# Altium PCB ESC_4in1_8layer.PcbDoc (part 2 of 2)
Units mm, origin at the board's own origin, x right, y up, seen from the top; angles counter-clockwise.
Board outline 33 x 33 mm, 8 copper layers (Top Layer, VBAT 1, Signal 1, GND 1, VBAT 2, Signal 2, GND 2, Bottom Layer), stack 1.028 mm thick; 215 components, 149 nets, 833 pads, 210 vias.
Unrouted connection lines stored in the file: 316.
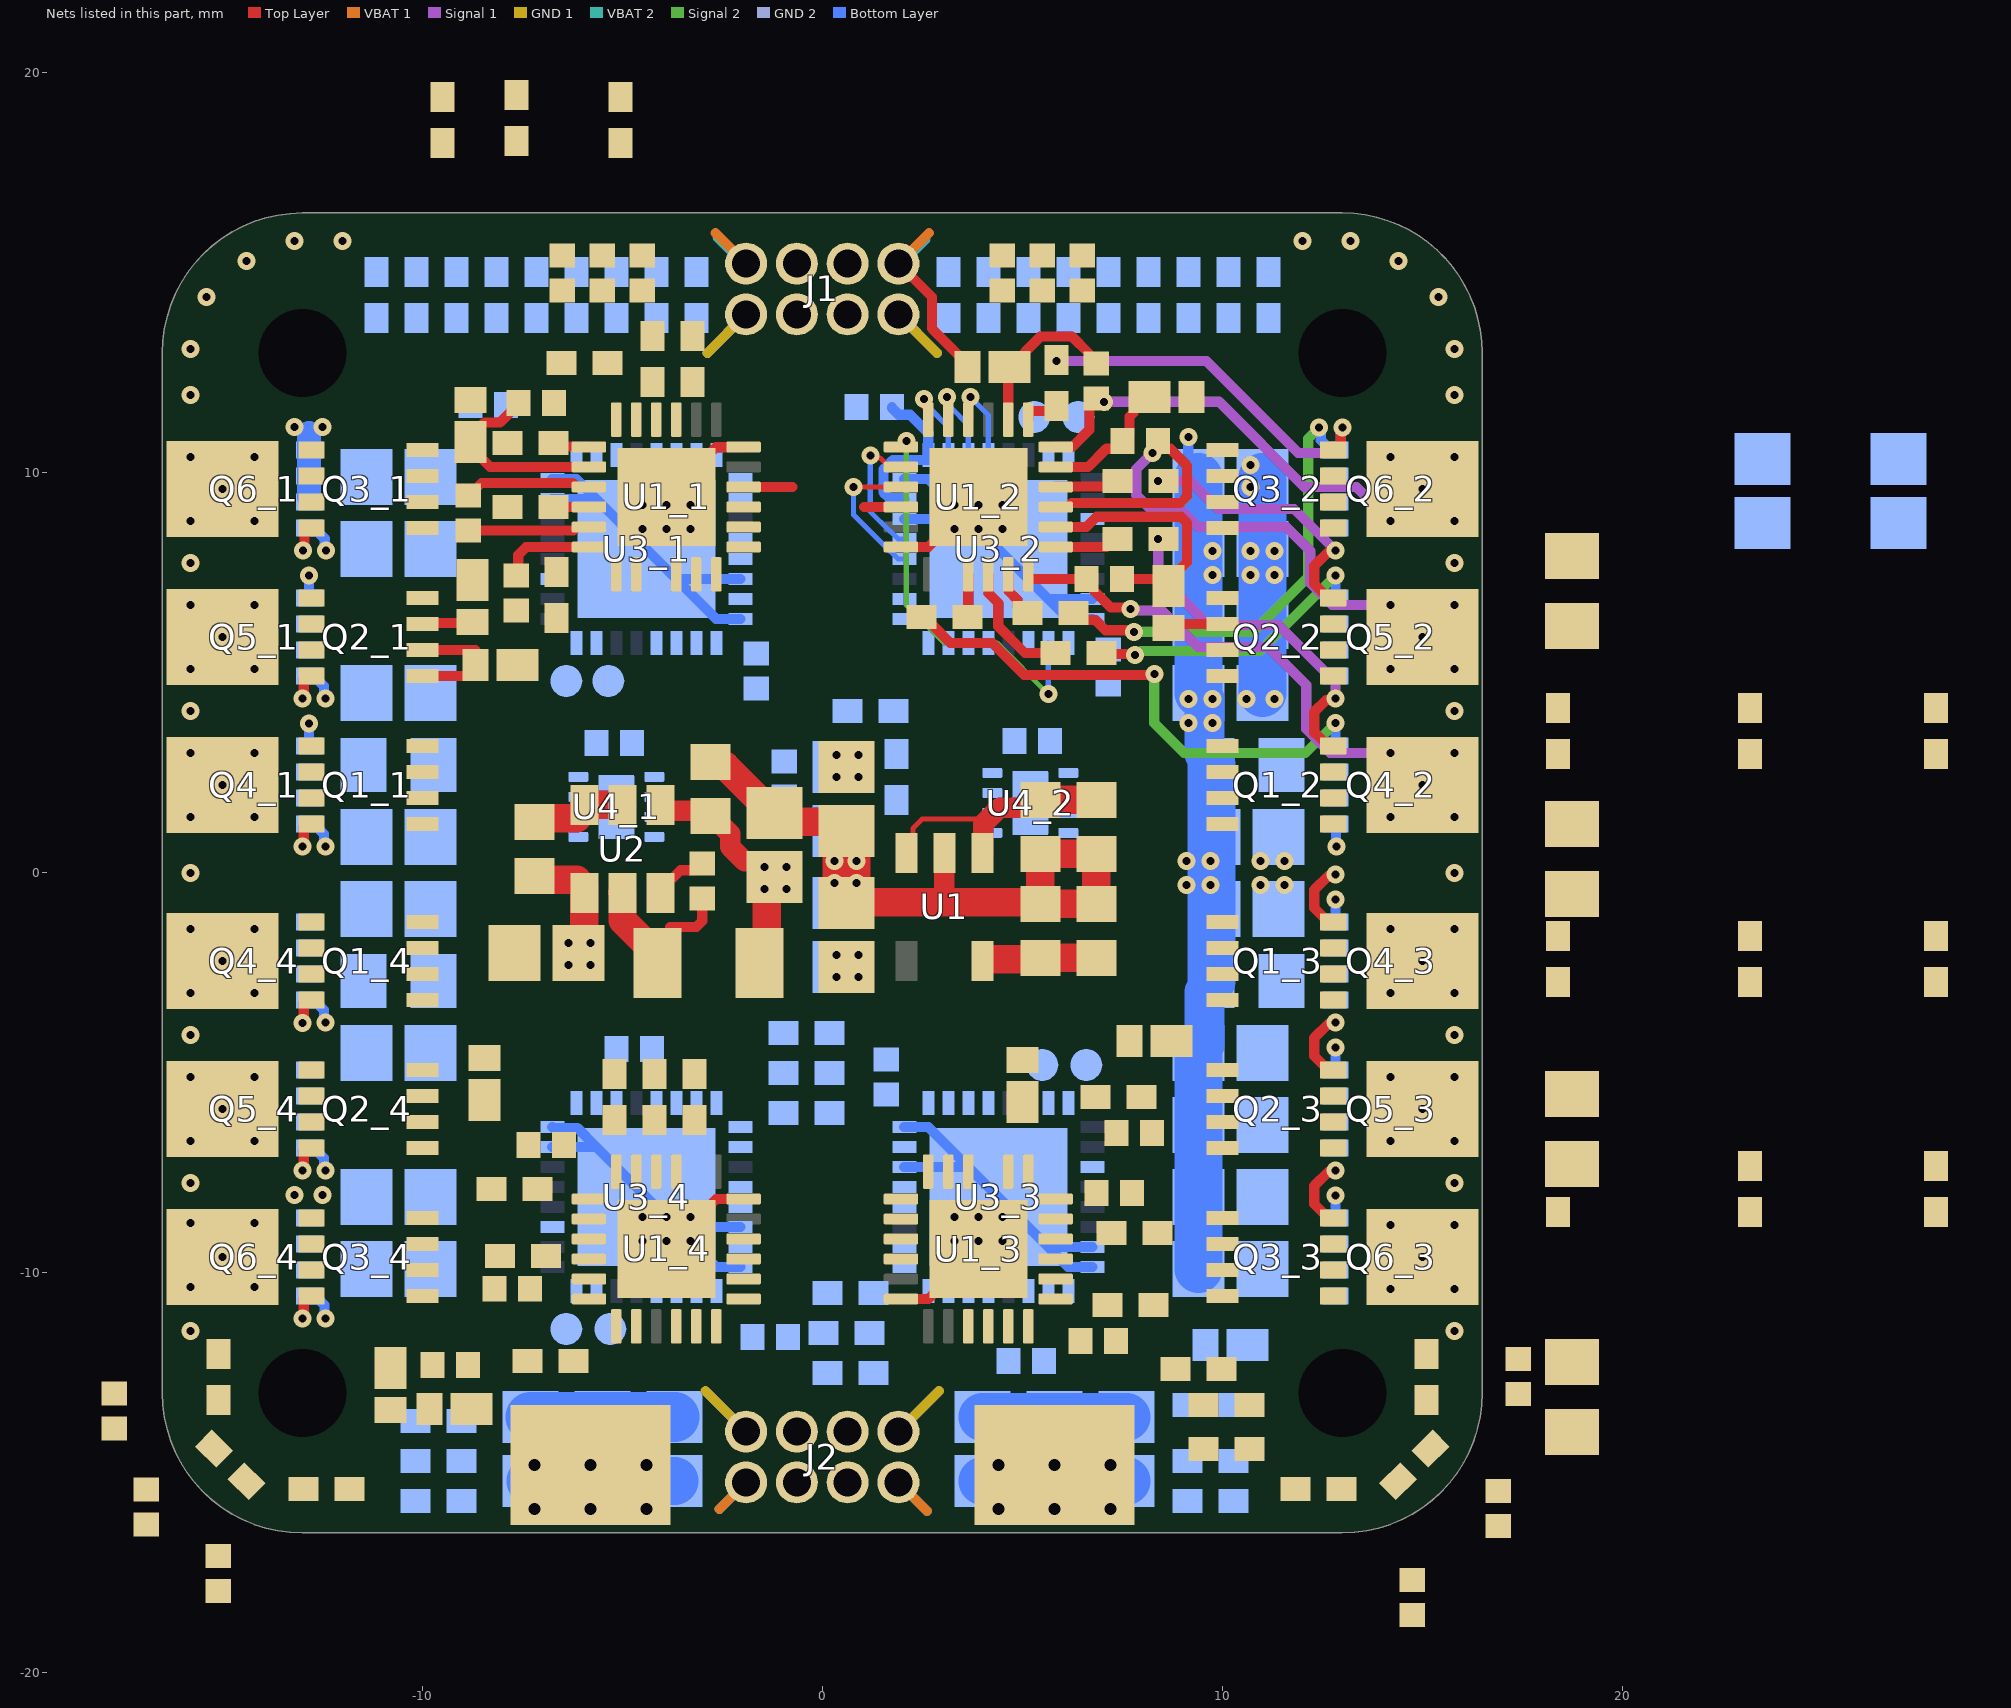
[diagram p8: the nets of this part, all layers, seen from the top]

## Via types
v1: diameter 0.45, hole 0.2, Top Layer to Bottom Layer, tented both sides, 198 vias
v2: diameter 0.6, hole 0.3, Top Layer to Bottom Layer, tented both sides, 12 vias

## Nets (pads, with @x,y where several pads share a name; then routed paths per layer and width w, separated by ;. In a path a pad name is that pad's centre, name@x,y a point inside that pad or via, vN(x,y) a via of type N, cw(c..) or ccw(c..) an arc to the next point about the centre after c; other vN are vias at no path point)
3V3: C8.1 C9.2 C16_1.2 C16_2.2 C16_3.2 C16_4.2 C17_1.2 C17_2.2 C17_3.2 C17_4.2 C32_1.1 C32_2.1 U1.5 U3_1.1 U3_1.15 U3_1.17 U3_2.1 U3_2.15 U3_2.17 U3_3.1 U3_3.15 U3_3.17 U3_4.1 U3_4.15 U3_4.17 U4_1.8 U4_2.8 | length 7
  Top Layer w0.712: U1.5@4.1,-2.163 5.412,-2.163 C9.2@5.45,-2.125 C8.1@6.85,-2.125
  Bottom Layer w0.254: C17_2.2@1.74,11.65 1.74,11.63 1.913,11.457 2.193,11.457 2.65,11 U3_2.17@2.65,10.45 2.65,10.344 2.627,10.321 1.766,10.321 1.527,10.082 1.527,9.522 1.676,9.373 2.027,9.373 U3_2.15@2.05,9.35
5V: C6.2 C7.1 C12.2 C13.2 L1.2 U1.1 U1.3 U2.1 | length 12.8
  Top Layer w0.127: U1.3@2.1,0.5 2.266,0.666 2.266,1.116 2.5,1.35 3.888,1.35 4.019,1.219
  Top Layer w0.254: C13.2@-1.481,-0.381 -1.469,-0.381 v1(-1.45,-0.4) ; v1(-1.45,0.15) -1.337,0.037 C13.2@-1.2,-0.1
  Top Layer w0.512: U2.1@-4.044,1.556 C12.2@-2.981,1.556 ; C12.2@-2.8,1.425 -2.75,1.425 -2.3,0.975 -2.3,0.65 -1.944,0.294 -1.644,0.294 -1.625,0.275 -1.625,-0.025 C13.2@-1.512,-0.138 ; U1.1@4,0.5 4.019,0.519 4.019,1.219 4.431,1.631 5.256,1.631 C6.2@5.45,1.825
  Top Layer w0.712: U2.1@-4.05,1.7 -4.05,1.562 U2.1@-4.044,1.556 ; C12.2@-2.85,1.425 C12.2@-2.8,1.425 ; L1.2@-1.575,-2.25 -1.387,-2.063 -1.387,-0.394 -1.437,-0.394 C13.2@-1.451,-0.381 ; C13.2@-1.481,-0.381 -1.375,-0.275 C13.2@-1.2,-0.1 ; C6.2@5.45,1.825 C7.1@6.85,1.825
  other v1: -0.9,-0.4 -0.9,0.15 -14.4,15.3 14.4,15.3 -13.2,15.8 -12,15.8 12,15.8 13.2,15.8
BSTA_1: C3_1.1 D1_1.1 U1_1.20
BSTA_2: C3_2.1 D1_2.1 U1_2.20 | length 4.2
  Top Layer w0.254: U1_2.20@4.65,11.335 4.65,12.625 D1_2.1@4.675,12.65 4.8,12.65 5.073,12.923 5.073,13.028 5.461,13.416 6.239,13.416 6.657,12.998 6.657,12.913 6.83,12.74 C3_2.1@6.85,12.74
BSTA_3: C3_3.1 D1_3.1 U1_3.20
BSTA_4: C3_4.1 D1_4.1 U1_4.20
BSTB_1: C2_1.1 D2_1.1 U1_1.17 | length 3.1
  Top Layer w0.254: C2_1.1@-8.85,8.56 -6.22,8.56 -6.13,8.65 U1_1.17@-5.835,8.65
BSTB_2: C2_2.1 D2_2.1 U1_2.17 | length 3.4
  Top Layer w0.254: U1_2.17@5.835,10.15 6.646,10.15 7.103,10.607 7.337,10.607 7.51,10.78 C2_2.1@7.51,10.8 7.683,10.973 7.683,11.408 7.777,11.502 7.777,11.627 8.05,11.9 D2_2.1@8.175,11.9
BSTB_3: C2_3.1 D2_3.1 U1_3.17
BSTB_4: C2_4.1 D2_4.1 U1_4.17
BSTC_1: C1_1.1 D3_1.1 U1_1.14 | length 5
  Top Layer w0.254: C1_1.1@-7.59,11.75 -7.59,11.73 -8.054,11.266 -8.434,11.266 -8.8,10.9 D3_1.1@-8.8,10.775 -8.8,10.65 -8.3,10.15 U1_1.14@-5.835,10.15
BSTC_2: C1_2.1 D3_2.1 U1_2.14 | length 6.5
  Top Layer w0.254: U1_2.14@5.835,8.65 6.6,8.65 6.857,8.907 8.967,8.907 9.116,8.758 9.116,7.766 8.65,7.3 D3_2.1@8.65,7.175 8.475,7.35 C1_2.1@7.49,7.35
BSTC_3: C1_3.1 D3_3.1 U1_3.14
BSTC_4: C1_4.1 D3_4.1 U1_4.14
ESC1: J1.3 U3_1.27
ESC2: J1.5 U3_2.27
ESC3: J2.3 U3_3.27
ESC4: J2.5 U3_4.27
GHA_1: R3_1.1 U1_1.19
GHA_2: R3_2.1 U1_2.19 | length 1
  Top Layer w0.254: U1_2.19@5.15,11.335 5.15,11.538 5.158,11.546 5.721,11.546 R3_2.1@5.85,11.675
GHA_3: R3_3.1 U1_3.19
GHA_4: R3_4.1 U1_4.19
GHB_1: R14_1.1 U1_1.16 | length 0.9
  Top Layer w0.254: R14_1.1@-6.725,9.15 U1_1.16@-5.835,9.15
GHB_2: R14_2.1 U1_2.16 | length 1.6
  Top Layer w0.254: U1_2.16@5.835,9.65 5.843,9.658 7.233,9.658 R14_2.1@7.375,9.8
GHB_3: R14_3.1 U1_3.16
GHB_4: R14_4.1 U1_4.16
GHC_1: R16_1.1 U1_1.13 | length 0.9
  Top Layer w0.254: R16_1.1@-6.725,10.75 -6.633,10.658 -5.843,10.658 U1_1.13@-5.835,10.65
GHC_2: R16_2.1 U1_2.13 | length 1.6
  Top Layer w0.254: U1_2.13@5.835,8.15 7.1,8.15 7.3,8.35 R16_2.1@7.375,8.35
GHC_3: R16_3.1 U1_3.13
GHC_4: R16_4.1 U1_4.13
GLA_1: R13_1.1 R20_1.1 U1_1.11
GLA_2: R13_2.1 R20_2.1 U1_2.11 | length 1.2
  Top Layer w0.254: U1_2.11@4.65,7.465 4.658,7.457 4.658,7.049 4.877,6.83 4.877,6.673 5.05,6.5 R13_2.1@5.125,6.5
GLA_3: R13_3.1 R20_3.1 U1_3.11
GLA_4: R13_4.1 R20_4.1 U1_4.11
GLB_1: R15_1.1 R21_1.1 U1_1.10
GLB_2: R15_2.1 R21_2.1 U1_2.10 | length 3.1
  Top Layer w0.254: U1_2.10@4.15,7.465 4.158,7.457 4.158,6.992 4.4,6.75 4.4,6.169 5.069,5.5 R15_2.1@5.825,5.5
GLB_3: R15_3.1 R21_3.1 U1_3.10
GLB_4: R15_4.1 R21_4.1 U1_4.10
GLC_1: R17_1.1 R22_1.1 U1_1.9
GLC_2: R17_2.1 R22_2.1 U1_2.9 | length 1.1
  Top Layer w0.254: R17_2.1@3.625,6.4 3.65,6.425 U1_2.9@3.65,7.465
GLC_3: R17_3.1 R22_3.1 U1_3.9
GLC_4: R17_4.1 R22_4.1 U1_4.9
GND: C1.1 C2.1 C3.1 C4.1 C5.1 C6.1 C7.2 C8.2 C9.1 C11.1 C12.1 C13.1 C14.1 C15.2 C16.1 C16_1.1 C16_2.1 C16_3.1 C16_4.1 C17.1 C17_1.1 C17_2.1 C17_3.1 C17_4.1 C18.1 C19.1 C20.1 C21.1 C22.1 C23.1 C24.1 C25.1 C26.1 C27.1 C28.1 C29.1 C30.1 C31.1 C32_1.2 C32_2.2 C33.1 C34.1 C35.1 C36.1 C37.1 C38_1.1 C38_2.1 C38_3.1 C38_4.1 C39_1.1 C39_2.1 C39_3.1 C39_4.1 C40_1.1 C40_2.1 C40_3.1 C40_4.1 C41.1 C42.1 C43.1 C44.1 J1.1 J1.7 J2.1 J2.7 pad.2@5.8,-14.8 Q6_1.1 Q6_1.2 Q6_1.3 Q6_2.1 Q6_2.2 Q6_2.3 Q6_3.1 Q6_3.2 Q6_3.3 Q6_4.1 Q6_4.2 Q6_4.3 R1_1.1 R1_2.1 R1_3.1 R1_4.1 R10_1.1 R10_2.1 R10_3.1 R10_4.1 R11_1.1 R11_2.1 R11_3.1 R11_4.1 R12_1.1 R12_2.1 R12_3.1 R12_4.1 R18_1.1 R18_2.1 R18_3.1 R18_4.1 R19.1 R20_1.2 R20_2.2 R20_3.2 R20_4.2 R21_1.2 R21_2.2 R21_3.2 R21_4.2 R22_1.2 R22_2.2 R22_3.2 R22_4.2 U1.2 U1_1.6 U1_1.25 U1_2.6 U1_2.25 U1_3.6 U1_3.25 U1_4.6 U1_4.25 U2.4 U3_1.0 U3_1.14 U3_1.16 U3_1.31 U3_1.32 U3_2.0 U3_2.14 U3_2.16 U3_2.31 U3_2.32 U3_3.0 U3_3.14 U3_3.16 U3_3.31 U3_3.32 U3_4.0 U3_4.14 U3_4.16 U3_4.31 U3_4.32 | length 104.9
  Top Layer w0.254: U1_1.25@-3.9,9.4 -2.658,10.642 -1.973,10.642 U1_1.6@-1.965,10.65 ; v1(-3.3,-8.6) -3.1,-8.6 -2.802,-8.302 -2.802,-8.299 -2.653,-8.15 U1_4.6@-1.965,-8.15 ; U1_3.6@1.965,-10.65 2.65,-10.65 U1_3.25@3.9,-9.4 ; U1_2.6@1.965,8.15 2.65,8.15 U1_2.25@3.9,9.4
  Top Layer w0.512: 3.05,-0.737 U1.2@3.05,0.5
  Top Layer w0.712: C15.2@-7.2,-0.075 -7.106,-0.169 -6.143,-0.169 -5.95,-0.362 U2.4@-5.95,-0.5 -5.956,-0.506 -5.956,-1.856 C14.1@-6.1,-2 ; C12.1@-2.8,2.775 -2.706,2.681 -2.431,2.681 -1.25,1.5 C13.1@-1.2,1.5 -0.925,1.225 -0.875,1.275 0.375,1.275 C1.1@0.6,1.05 ; C22.1@0.3,-0.45 C22.1@0.587,-0.737 ; C22.1@0.6,-0.7 C22.1@0.85,-0.45 ; C22.1@0.85,-0.737 3.05,-0.737 C9.1@5.412,-0.737 ; C9.1@5.412,-0.737 5.45,-0.7 C6.1@5.45,0.475 C7.2@6.85,0.475 C8.2@6.85,-0.775 C9.1@5.45,-0.775 C9.1@5.412,-0.737
  Top Layer w1.2: C22.1@0.6,-0.15 C1.1@0.6,1.05
  GND 2 w0.254: -2.87,-13 J2.7@-1.905,-13.965 ; -2.87,13 J1.1@-1.905,13.965 ; J2.1@1.905,-13.965 2.87,-13 ; J1.7@1.905,13.965 2.87,13
  GND 1 w0.254: -2.92,-12.95 J2.7@-1.905,-13.965 ; -2.87,13 J1.1@-1.905,13.965 ; J2.1@1.905,-13.965 2.92,-12.95 ; J1.7@1.905,13.965 2.87,13
  Bottom Layer w0.254: U3_4.31@-6.75,-6.85 U3_4.0@-5.65,-6.85 ; U3_4.32@-6.75,-6.35 -6.727,-6.373 -6.127,-6.373 U3_4.0@-5.65,-6.85 ; U3_1.31@-6.75,9.35 U3_1.0@-5.65,9.35 ; U3_1.32@-6.75,9.85 -6.15,9.85 U3_1.0@-5.65,9.35 ; v1(-3.3,-8.6) -3.05,-8.85 U3_4.14@-2.05,-8.85 ; U3_4.16@-2.05,-9.85 -2.65,-9.85 v1(-3.3,-9.2) U3_4.0@-4.4,-8.1 U3_4.0@-5.65,-6.85 ; U3_1.16@-2.05,6.35 -2.65,6.35 U3_1.0@-3.65,7.35 ; U3_1.14@-2.05,7.35 U3_1.0@-3.65,7.35 ; U3_3.14@2.05,-7.35 U3_3.0@3.65,-7.35 ; U3_3.16@2.05,-6.35 2.65,-6.35 U3_3.0@3.65,-7.35 ; U3_2.14@2.05,8.85 U3_2.0@3.65,8.85 ; U3_2.16@2.05,9.85 2.65,9.85 v1(3.3,9.2) U3_2.0@3.65,8.85 ; U3_3.32@6.75,-9.85 6.15,-9.85 U3_3.0@5.65,-9.35 ; U3_3.31@6.75,-9.35 U3_3.0@5.65,-9.35 ; U3_2.32@6.75,6.35 6.15,6.35 U3_2.0@5.65,6.85 ; U3_2.31@6.75,6.85 U3_2.0@5.65,6.85 ; v1(9.15,10.9) 9.15,10.15 C42.1@9.4,9.9 ; U3_1.0@-5.65,9.35 U3_1.0@-4.4,8.1 U3_1.0@-3.65,7.35 ; U3_3.0@3.65,-7.35 U3_3.0@4.4,-8.1 U3_3.0@5.65,-9.35 ; U3_2.0@3.65,8.85 U3_2.0@4.4,8.1 U3_2.0@5.65,6.85
  Bottom Layer w0.6: Q6_1.3@-12.83,9.402 Q6_1.2@-12.83,9.925 Q6_1.1@-12.83,10.575 -12.83,11
  Bottom Layer w1: C28.1@9.35,-4.45 9.4,-4.45 9.55,-4.3 9.55,-2.975 9.725,-2.8 R1_3.1@9.725,-2.7 ; C33.1@9.4,4.5 C33.1@9.55,4.35 ; R1_2.1@9.55,2.987 9.55,3.75 C33.1@9.55,4.313
  Bottom Layer w1.2: C26.1@4,-15.2 C25.1@5.8,-15.2 C23.1@7.6,-15.2 ; C2.1@9.4,-9.9 C24.1@9.4,-8.1 C34.1@9.4,-6.3 C28.1@9.4,-4.5 ; C33.1@9.4,4.5 C20.1@9.4,6.3 C43.1@9.4,8.1 C42.1@9.4,9.9 ; R1_3.1@9.725,-2.7 C30.1@9.725,0.9 ; C30.1@9.725,0.975 R1_2.1@9.725,2.7
  Bottom Layer w1.25: C5.1@-7.3,-13.6 C21.1@-5.5,-13.6 C18.1@-3.7,-13.6
  other v1: -15.8,-11.45 15.8,-11.45 -4.5,-9.2 -3.9,-9.2 3.3,-9.2 3.9,-9.2 4.5,-9.2 -4.5,-8.6 -3.9,-8.6 3.3,-8.6 3.9,-8.6 4.5,-8.6 -13.2,-8.05 -12.5,-8.05 -15.8,-7.75 15.8,-7.75 -15.8,-4.05 15.8,-4.05 -6.35,-2.3 -5.8,-2.3 -6.35,-1.75 -5.8,-1.75 9.1,-0.3 9.7,-0.3 0.3,-0.25 0.85,-0.25 -15.8,0 15.8,0 0.3,0.3 0.85,0.3 9.1,0.3 9.7,0.3 9.15,3.75 9.75,3.75 -15.8,4.05 15.8,4.05 9.15,4.35 9.75,4.35 9.75,7.45 -15.8,7.75 15.8,7.75 9.75,8.05 -4.5,8.6 -3.9,8.6 -3.3,8.6 3.3,8.6 3.9,8.6 4.5,8.6 -4.5,9.2 -3.9,9.2 -3.3,9.2 3.9,9.2 4.5,9.2 -13.2,11.15 -12.5,11.15 -15.8,11.95 15.8,11.95 -15.8,13.1 15.8,13.1 -15.4,14.4 15.4,14.4
  other v2: 4.4,-15.9 5.8,-15.9 7.2,-15.9 4.4,-14.8 5.8,-14.8 7.2,-14.8
GU_H1: Q1_1.4 R3_1.2 | length 0.7
  Top Layer w0.254: v1(-13,0.663) -12.962,0.701 -12.962,1.142 -12.879,1.225 Q1_1.4@-12.77,1.225
GU_H2: Q1_2.4 R16_2.2 | length 8.8
  Top Layer w0.254: v1(8.398,8.35) R16_2.2@8.525,8.35 ; Q1_2.4@12.77,3.175 12.65,3.175 12.325,3.5 12.3,3.5 12.3,4.027 12.599,4.325 12.792,4.325 v1(12.83,4.363)
  Signal 1 w0.254: v1(8.398,8.35) 8.398,7.452 9.65,6.2 11.4,6.2 12.83,4.77 v1(12.83,4.363)
GU_H3: Q1_3.4 R3_3.2 | length 1.8
  Top Layer w0.254: Q1_3.4@12.77,-1.225 12.65,-1.225 12.3,-0.875 12.3,-0.423 12.649,-0.075 12.792,-0.075 v1(12.83,-0.037)
GU_H4: Q1_4.4 R16_4.2 | length 0.7
  Top Layer w0.254: v1(-13,-3.75) -12.962,-3.712 -12.962,-3.258 -12.879,-3.175 Q1_4.4@-12.77,-3.175
GU_L1: Q4_1.4 R13_1.2 | length 0.8
  Bottom Layer w0.254: Q4_1.4@-12.83,1.225 -12.71,1.225 -12.461,0.976 -12.461,0.701 v1(-12.423,0.663)
GU_L2: Q4_2.4 R17_2.2 | length 13.4
  Top Layer w0.254: R17_2.2@2.475,6.4 2.648,6.227 2.723,6.227 3.2,5.75 4.25,5.75 5.05,4.95 8.279,4.95 v1(8.3,4.971)
  Signal 2 w0.254: v1(8.3,4.971) 8.3,3.75 9.05,3 12.08,3 v1(12.83,3.75)
  Bottom Layer w0.254: Q4_2.4@12.83,3.175 v1(12.83,3.75)
GU_L3: Q4_3.4 R13_3.2 | length 0.6
  Bottom Layer w0.254: Q4_3.4@12.83,-1.225 v1(12.83,-0.663)
GU_L4: Q4_4.4 R17_4.2 | length 0.8
  Bottom Layer w0.254: Q4_4.4@-12.83,-3.175 -12.71,-3.175 -12.46,-3.425 -12.46,-3.699 v1(-12.423,-3.737)
GV_H1: Q2_1.4 R14_1.2 | length 0.7
  Top Layer w0.254: v1(-13,4.363) -12.962,4.401 -12.962,4.842 -12.879,4.925 Q2_1.4@-12.77,4.925
GV_H2: Q2_2.4 R14_2.2 | length 7
  Top Layer w0.254: v1(8.398,9.8) R14_2.2@8.525,9.8 ; Q2_2.4@12.77,6.875 12.65,6.875 12.3,7.225 12.3,7.677 12.649,8.025 12.792,8.025 v1(12.83,8.063)
  Signal 1 w0.254: v1(8.398,9.8) 9.2,9.8 9.9,9.1 11.793,9.1 v1(12.83,8.063)
GV_H3: Q2_3.4 R14_3.2 | length 1.8
  Top Layer w0.254: Q2_3.4@12.77,-4.925 12.65,-4.925 12.3,-4.575 12.3,-4.123 12.649,-3.775 12.792,-3.775 v1(12.83,-3.737)
GV_H4: Q2_4.4 R14_4.2 | length 0.7
  Top Layer w0.254: v1(-13,-7.437) -12.962,-7.399 -12.962,-6.958 -12.879,-6.875 Q2_4.4@-12.77,-6.875
GV_L1: Q5_1.4 R15_1.2 | length 0.8
  Bottom Layer w0.254: Q5_1.4@-12.83,4.925 -12.71,4.925 -12.461,4.676 -12.461,4.401 v1(-12.423,4.363)
GV_L2: Q5_2.4 R15_2.2 | length 7.3
  Top Layer w0.254: R15_2.2@6.975,5.5 7,5.475 7.797,5.475 v1(7.822,5.45)
  Signal 2 w0.254: v1(7.822,5.45) 7.875,5.45 7.975,5.55 10.943,5.55 v1(12.83,7.437)
  Bottom Layer w0.254: Q5_2.4@12.83,6.875 v1(12.83,7.437)
GV_L3: Q5_3.4 R15_3.2 | length 0.6
  Bottom Layer w0.254: Q5_3.4@12.83,-4.925 v1(12.83,-4.363)
GV_L4: Q5_4.4 R15_4.2 | length 0.8
  Bottom Layer w0.254: Q5_4.4@-12.83,-6.875 -12.71,-6.875 -12.461,-7.124 -12.461,-7.399 v1(-12.423,-7.437)
GW_H1: Q3_1.4 R16_1.2 | length 0.7
  Top Layer w0.254: v1(-12.979,8.063) -12.941,8.101 -12.941,8.542 -12.858,8.625 Q3_1.4@-12.77,8.625
GW_H2: Q3_2.4 R3_2.2 | length 9.3
  Top Layer w0.254: v1(5.85,12.8) R3_2.2@5.85,12.825 ; Q3_2.4@12.77,10.575 12.879,10.575 12.962,10.658 12.962,11.099 v1(13,11.137)
  Signal 1 w0.254: v1(5.85,12.8) 9.6,12.8 11.9,10.5 12.7,10.5 12.962,10.762 12.962,11.099 v1(13,11.137)
GW_H3: Q3_3.4 R16_3.2 | length 1.8
  Top Layer w0.254: Q3_3.4@12.77,-8.625 12.65,-8.625 12.3,-8.275 12.3,-7.823 12.649,-7.475 12.792,-7.475 v1(12.83,-7.437)
GW_H4: Q3_4.4 R3_4.2 | length 0.7
  Top Layer w0.254: v1(-13,-11.137) -12.962,-11.099 -12.962,-10.658 -12.879,-10.575 Q3_4.4@-12.77,-10.575
GW_L1: Q6_1.4 R17_1.2 | length 0.8
  Bottom Layer w0.254: Q6_1.4@-12.83,8.625 -12.71,8.625 -12.44,8.355 -12.44,8.103 v1(-12.402,8.065)
GW_L2: Q6_2.4 R13_2.2 | length 11.2
  Top Layer w0.254: R13_2.2@6.275,6.5 6.448,6.327 6.823,6.327 7.082,6.068 7.755,6.068 v1(7.793,6.031)
  Signal 2 w0.254: v1(7.793,6.031) 10.781,6.031 12.15,7.4 12.15,10.864 v1(12.423,11.137)
  Bottom Layer w0.254: v1@12.461,11.099 12.461,10.824 12.71,10.575 Q6_2.4@12.83,10.575
GW_L3: Q6_3.4 R17_3.2 | length 0.6
  Bottom Layer w0.254: Q6_3.4@12.83,-8.625 v1(12.83,-8.063)
GW_L4: Q6_4.4 R13_4.2 | length 0.8
  Bottom Layer w0.254: Q6_4.4@-12.83,-10.575 -12.747,-10.658 -12.591,-10.658 -12.442,-10.807 -12.442,-11.117 v1(-12.423,-11.137)
ISNS1: U3_1.10 U4_1.1
ISNS2: U3_2.10 U4_2.1
ISNS3: U3_3.10 U4_2.7
ISNS4: U3_4.10 U4_1.7
MOTOR_GND_1: U4_1.2 U4_1.4 U4_1.6 U4_1.9
MOTOR_GND_2: U4_2.2 U4_2.4 U4_2.6 U4_2.9
NetC10_1: C10.1 L1.1 U2.5 | length 4.6
  Top Layer w0.254: L1.1@-4.125,-2.25 -3.802,-1.927 -3.802,-1.352 -3.152,-1.352 -3,-1.2 C10.1@-3,-0.64
  Top Layer w0.712: U2.5@-5,-0.5 -4.994,-0.506 -4.994,-1.183 -4.446,-1.731 -4.369,-1.731 -4.125,-1.975 L1.1@-4.125,-2.25
NetC10_2: C10.2 U2.6 | length 1.4
  Top Layer w0.254: U2.6@-4.05,-0.5 -4.05,-0.35 -3.827,-0.127 -3.736,-0.127 -3.542,0.067 -3.173,0.067 C10.2@-3,0.24
NetQ5_1_1: Q5_1.1 Q5_1.2 Q5_1.3 R18_1.2 | length 0.6
  Bottom Layer w0.254: Q5_1.1@-12.83,6.875 v1(-12.83,7.437)
NetQ5_2_1: Q5_2.1 Q5_2.2 Q5_2.3 R18_2.2
NetQ5_3_1: Q5_3.1 Q5_3.2 Q5_3.3 R18_3.2
NetQ5_4_1: Q5_4.1 Q5_4.2 Q5_4.3 R18_4.2
OUT_U1: C3_1.2 pad.1@-15,2.2 Q1_1.1 Q1_1.2 Q1_1.3 Q4_1.5 Q4_1.6 Q4_1.7 Q4_1.8 R5_1.2 U1_1.18 | length 2.4
  Top Layer w0.254: C3_1.2@-7.65,7.44 -7.6,7.49 -7.6,7.95 -7.4,8.15 U1_1.18@-5.835,8.15
  other v1: -15.8,1.4 -14.2,1.4 -15,2.2 -15.8,3 -14.2,3
OUT_U2: C1_2.2 pad.1@15,2.2 Q1_2.1 Q1_2.2 Q1_2.3 Q4_2.5 Q4_2.6 Q4_2.7 Q4_2.8 R5_2.2 U1_2.12 | length 11.7
  Top Layer w0.254: U1_2.12@5.15,7.465 5.15,7.358 5.158,7.35 C1_2.2@6.61,7.35 6.783,7.177 6.783,7.067 7.212,6.638 7.662,6.638 v1(7.7,6.6)
  Signal 1 w0.254: v1(7.7,6.6) 7.738,6.562 8.488,6.562 9.4,5.65 11.15,5.65 12.1,4.7 12.1,3.6 12.7,3 v1(14.2,3)
  other v1: 14.2,1.4 15.8,1.4 15,2.2 15.8,3
OUT_U3: C3_3.2 pad.1@15,-2.2 Q1_3.1 Q1_3.2 Q1_3.3 Q4_3.5 Q4_3.6 Q4_3.7 Q4_3.8 R5_3.2 U1_3.18
  other v1: 14.2,-3 15.8,-3 15,-2.2 14.2,-1.4 15.8,-1.4
OUT_U4: C1_4.2 pad.1@-15,-2.2 Q1_4.1 Q1_4.2 Q1_4.3 Q4_4.5 Q4_4.6 Q4_4.7 Q4_4.8 R5_4.2 U1_4.12
  other v1: -15.8,-3 -14.2,-3 -15,-2.2 -15.8,-1.4 -14.2,-1.4
OUT_V1: C2_1.2 pad.3@-15,5.9 Q2_1.1 Q2_1.2 Q2_1.3 Q5_1.5 Q5_1.6 Q5_1.7 Q5_1.8 R7_1.2 U1_1.15 | length 3.2
  Top Layer w0.254: C2_1.2@-8.85,9.44 -8.83,9.44 -8.52,9.75 -6.23,9.75 -6.13,9.65 U1_1.15@-5.835,9.65
  other v1: -15.8,5.1 -14.2,5.1 -15,5.9 -15.8,6.7 -14.2,6.7
OUT_V2: C2_2.2 pad.2@15,5.9 Q2_2.1 Q2_2.2 Q2_2.3 Q5_2.5 Q5_2.6 Q5_2.7 Q5_2.8 R7_2.2 U1_2.15 | length 14.7
  Top Layer w0.254: U1_2.15@5.835,9.15 6.13,9.15 6.23,9.25 8.955,9.25 9.116,9.411 9.116,10.189 8.698,10.607 8.563,10.607 8.39,10.78 C2_2.2@8.39,10.8 8.288,10.698 8.288,10.538 v1(8.25,10.5)
  Signal 1 w0.254: v1(8.25,10.5) 7.85,10.1 7.85,9.449 8.249,9.05 9,9.05 9.4,8.65 11.6,8.65 12.2,8.05 12.2,7.25 12.75,6.7 v1(14.2,6.7)
  other v1: 14.2,5.1 15.8,5.1 15,5.9 15.8,6.7
OUT_V3: C2_3.2 pad.2@15,-5.9 Q2_3.1 Q2_3.2 Q2_3.3 Q5_3.5 Q5_3.6 Q5_3.7 Q5_3.8 R7_3.2 U1_3.15
  other v1: 14.2,-6.7 15.8,-6.7 15,-5.9 14.2,-5.1 15.8,-5.1
OUT_V4: C2_4.2 pad.2@-15,-5.9 Q2_4.1 Q2_4.2 Q2_4.3 Q5_4.5 Q5_4.6 Q5_4.7 Q5_4.8 R7_4.2 U1_4.15
  other v1: -15.8,-6.7 -14.2,-6.7 -15,-5.9 -15.8,-5.1 -14.2,-5.1
OUT_W1: C1_1.2 pad.3@-15,9.6 Q3_1.1 Q3_1.2 Q3_1.3 Q6_1.5 Q6_1.6 Q6_1.7 Q6_1.8 R9_1.2 U1_1.12
  other v1: -15.8,8.8 -14.2,8.8 -15,9.6 -15.8,10.4 -14.2,10.4
OUT_W2: C3_2.2 pad.3@15,9.6 Q3_2.1 Q3_2.2 Q3_2.3 Q6_2.5 Q6_2.6 Q6_2.7 Q6_2.8 R9_2.2 U1_2.18 | length 11.3
  Top Layer w0.254: U1_2.18@5.835,10.65 5.843,10.658 6.258,10.658 6.679,11.079 ; C3_2.2@6.85,11.86 6.679,11.689 6.679,11.079 ; v1(7.05,11.779) 7.029,11.779 7,11.75 6.742,11.75 6.679,11.687 6.679,11.079
  Signal 1 w0.254: v1(7.05,11.779) 9.921,11.779 12.05,9.65 13.35,9.65 v1(14.2,8.8)
  other v1: 15.8,8.8 15,9.6 14.2,10.4 15.8,10.4
OUT_W3: C1_3.2 pad.3@15,-9.6 Q3_3.1 Q3_3.2 Q3_3.3 Q6_3.5 Q6_3.6 Q6_3.7 Q6_3.8 R9_3.2 U1_3.12
  other v1: 14.2,-10.4 15.8,-10.4 15,-9.6 14.2,-8.8 15.8,-8.8
OUT_W4: C3_4.2 pad.3@-15,-9.6 Q3_4.1 Q3_4.2 Q3_4.3 Q6_4.5 Q6_4.6 Q6_4.7 Q6_4.8 R9_4.2 U1_4.18
  other v1: -15.8,-10.35 -14.2,-10.35 -15,-9.6 -15.8,-8.75 -14.2,-8.75
PWM_UH1: U1_1.22 U3_1.18
PWM_UH2: U1_2.24 U3_2.18 | length 2.2
  Top Layer w0.254: v1(2.548,11.85) 2.586,11.812 2.586,11.694 2.65,11.63 U1_2.24@2.65,11.335
  Bottom Layer w0.127: v1(2.548,11.85) 2.548,11.762 2.666,11.645 2.666,11.634 3.15,11.15 U3_2.18@3.15,10.45
PWM_UH3: U1_3.22 U3_3.18
PWM_UH4: U1_4.24 U3_4.18
PWM_UL1: U1_1.1 U3_1.12
PWM_UL2: U1_2.3 U3_2.12 | length 3.6
  Top Layer w0.127: v1(0.785,9.65) U1_2.3@1.965,9.65
  Bottom Layer w0.127: v1(0.785,9.65) 0.785,8.949 1.687,8.047 1.703,8.047 1.9,7.85 U3_2.12@2.05,7.85
PWM_UL3: U1_3.1 U3_3.12
PWM_UL4: U1_4.3 U3_4.12
PWM_VH1: U1_1.23 U3_1.19
PWM_VH2: U1_2.23 U3_2.19 | length 2.2
  Top Layer w0.254: v1(3.123,11.9) 3.142,11.881 3.142,11.343 U1_2.23@3.15,11.335
  Bottom Layer w0.127: v1(3.123,11.9) 3.185,11.838 3.185,11.665 3.65,11.2 U3_2.19@3.65,10.45
PWM_VH3: U1_3.23 U3_3.19
PWM_VH4: U1_4.23 U3_4.19
PWM_VL1: U1_1.2 U3_1.13
PWM_VL2: U1_2.2 U3_2.13 | length 3.4
  Top Layer w0.127: v1(1.201,10.434) 1.262,10.372 1.448,10.372 1.67,10.15 U1_2.2@1.965,10.15
  Bottom Layer w0.127: v1(1.201,10.434) 1.201,9.034 1.687,8.547 1.703,8.547 1.9,8.35 U3_2.13@2.05,8.35
PWM_VL3: U1_3.2 U3_3.13
PWM_VL4: U1_4.2 U3_4.13
PWM_WH1: U1_1.24 U3_1.20
PWM_WH2: U1_2.22 U3_2.20 | length 2.2
  Top Layer w0.254: U1_2.22@3.65,11.335 3.658,11.343 3.658,11.803 3.7,11.845 v1(3.7,11.898)
  Bottom Layer w0.127: v1(3.7,11.898) 4.15,11.448 U3_2.20@4.15,10.45
PWM_WH3: U1_3.24 U3_3.20
PWM_WH4: U1_4.22 U3_4.20
PWM_WL1: U1_1.3 U3_1.2
PWM_WL2: U1_2.1 U3_2.2 | length 10.1
  Top Layer w0.127: U1_2.1@1.965,10.65 1.965,10.665 v1(2.1,10.8)
  Signal 2 w0.127: v1(2.1,10.8) 2.1,6.7 3.05,5.75 4.371,5.75 v1(5.65,4.471)
  Bottom Layer w0.127: v1(5.65,4.471) U3_2.2@5.65,5.75
PWM_WL3: U1_3.3 U3_3.2
PWM_WL4: U1_4.1 U3_4.2
RPM1: J1.4 U3_1.7
RPM2: J1.6 U3_2.7
RPM3: J2.4 U3_3.7
RPM4: J2.6 U3_4.7
SNS_U1: C38_1.2 R4_1.2 R5_1.1 R10_1.2 U3_1.5
SNS_U2: C38_2.2 R4_2.2 R5_2.1 R10_2.2 U3_2.5
SNS_U3: C38_3.2 R4_3.2 R5_3.1 R10_3.2 U3_3.5
SNS_U4: C38_4.2 R4_4.2 R5_4.1 R10_4.2 U3_4.5
SNS_V1: C39_1.2 R6_1.2 R7_1.1 R11_1.2 U3_1.6
SNS_V2: C39_2.2 R6_2.2 R7_2.1 R11_2.2 U3_2.6
SNS_V3: C39_3.2 R6_3.2 R7_3.1 R11_3.2 U3_3.6
SNS_V4: C39_4.2 R6_4.2 R7_4.1 R11_4.2 U3_4.6
SNS_VBAT: C37.2 R2.1 R19.2 U3_1.3 U3_2.3 U3_3.3 U3_4.3
SNS_W1: C40_1.2 R8_1.2 R9_1.1 R12_1.2 U3_1.8
SNS_W2: C40_2.2 R8_2.2 R9_2.1 R12_2.2 U3_2.8
SNS_W3: C40_3.2 R8_3.2 R9_3.1 R12_3.2 U3_3.8
SNS_W4: C40_4.2 R8_4.2 R9_4.1 R12_4.2 U3_4.8
SNS_X1: R4_1.1 R6_1.1 R8_1.1 U3_1.9
SNS_X2: R4_2.1 R6_2.1 R8_2.1 U3_2.9
SNS_X3: R4_3.1 R6_3.1 R8_3.1 U3_3.9
SNS_X4: R4_4.1 R6_4.1 R8_4.1 U3_4.9
SWCLK_1: TP2_1.1 U3_1.24
SWCLK_2: TP2_2.1 U3_2.24
SWCLK_3: TP2_3.1 U3_3.24
SWCLK_4: TP2_4.1 U3_4.24
SWDIO_1: TP1_1.1 U3_1.23
SWDIO_2: TP1_2.1 U3_2.23
SWDIO_3: TP1_3.1 U3_3.23
SWDIO_4: TP1_4.1 U3_4.23
VBAT: C1.2 C2.2 C3.2 C4.2 C5.2 C11.2 C14.2 C15.1 C16.2 C17.2 C18.2 C19.2 C20.2 C21.2 C22.2 C23.2 C24.2 C25.2 C26.2 C27.2 C28.2 C29.2 C30.2 C31.2 C33.2 C34.2 C35.2 C36.2 C41.2 C42.2 C43.2 C44.2 D1_1.2 D1_2.2 D1_3.2 D1_4.2 D2_1.2 D2_2.2 D2_3.2 D2_4.2 D3_1.2 D3_2.2 D3_3.2 D3_4.2 J1.2 J1.8 J2.2 J2.8 pad.2@-5.8,-14.8 Q1_1.5 Q1_1.6 Q1_1.7 Q1_1.8 Q1_2.5 Q1_2.6 Q1_2.7 Q1_2.8 Q1_3.5 Q1_3.6 Q1_3.7 Q1_3.8 Q1_4.5 Q1_4.6 Q1_4.7 Q1_4.8 Q2_1.5 Q2_1.6 Q2_1.7 Q2_1.8 Q2_2.5 Q2_2.6 Q2_2.7 Q2_2.8 Q2_3.5 Q2_3.6 Q2_3.7 Q2_3.8 Q2_4.5 Q2_4.6 Q2_4.7 Q2_4.8 Q3_1.5 Q3_1.6 Q3_1.7 Q3_1.8 Q3_2.5 Q3_2.6 Q3_2.7 Q3_2.8 Q3_3.5 Q3_3.6 Q3_3.7 Q3_3.8 Q3_4.5 Q3_4.6 Q3_4.7 Q3_4.8 R2.2 U1_1.4 U1_2.4 U1_3.4 U1_4.4 U2.2 U2.3 | length 33.4
  Top Layer w0.254: Q2_1.5@-10,4.925 D1_1.2@-8.875,4.925 ; Q2_1.6@-10,5.575 D1_1.2@-8.675,5.575 ; Q2_1.7@-10,6.225 -9.975,6.25 D2_1.2@-8.775,6.25 ; U1_1.4@-1.965,9.65 -0.75,9.65 ; 1.05,9.15 U1_2.4@1.965,9.15 ; J1.8@1.905,15.235 2.742,14.398 2.742,13.608 3.625,12.725 D1_2.2@3.625,12.65 ; D3_2.2@8.75,6.225 Q2_2.6@10,6.225
  Top Layer w0.712: C15.1@-7.2,1.275 -7.106,1.369 -6.143,1.369 -5.95,1.562 U2.3@-5.95,1.7 U2.2@-5,1.7
  VBAT 1 w0.254: -2.67,16 J1.2@-1.905,15.235 ; -2.57,-15.9 J2.8@-1.905,-15.235 ; J2.2@1.905,-15.235 2.62,-15.95 ; J1.8@1.905,15.235 2.67,16
  VBAT 2 w0.254: -2.615,15.885 J1.2@-1.9,15.17 ; -2.57,-15.9 J2.8@-1.905,-15.235 ; J2.2@1.905,-15.235 2.62,-15.95 ; J1.8@1.91,15.17 2.575,15.835
  Bottom Layer w1.2: C5.2@-7.3,-15.2 C21.2@-5.5,-15.2 C18.2@-3.7,-15.2 ; C26.2@4,-13.6 C25.2@5.8,-13.6 C23.2@7.6,-13.6 ; C33.2@11,4.5 C20.2@11,6.3 C43.2@11,8.1 C42.2@11,9.9
  other v1: 0.35,-2.6 0.9,-2.6 0.35,-2.05 0.9,-2.05 10.95,-0.3 11.55,-0.3 10.95,0.3 11.55,0.3 0.35,2.4 0.9,2.4 0.35,2.95 0.9,2.95 10.6,4.35 11.3,4.35 10.7,7.45 11.3,7.45 10.7,8.05 11.3,8.05 10.7,9.65 10.7,10.2
  other v2: -7.2,-15.9 -5.8,-15.9 -4.4,-15.9 -7.2,-14.8 -5.8,-14.8 -4.4,-14.8
VSS_R1: Q4_1.1 Q4_1.2 Q4_1.3 R1_1.2 U4_1.3 | length 0.6
  Bottom Layer w0.254: Q4_1.1@-12.83,3.175 v1(-12.83,3.737)
VSS_R2: Q4_2.1 Q4_2.2 Q4_2.3 R1_2.2 U4_2.3 | length 0.6
  Bottom Layer w0.254: Q4_2.1@12.83,1.225 12.84,1.215 12.84,0.673 v1(12.85,0.663)
VSS_R3: Q4_3.1 Q4_3.2 Q4_3.3 R1_3.2 U4_2.5
VSS_R4: Q4_4.1 Q4_4.2 Q4_4.3 R1_4.2 U4_1.5
pads on no net: U1.4 U1_1.5 U1_1.7 U1_1.8 U1_1.21 U1_2.5 U1_2.7 U1_2.8 U1_2.21 U1_3.5 U1_3.7 U1_3.8 U1_3.21 U1_4.5 U1_4.7 U1_4.8 U1_4.21 U3_1.4 U3_1.11 U3_1.21 U3_1.22 U3_1.25 U3_1.26 U3_1.28 U3_1.29 U3_1.30 U3_2.4 U3_2.11 U3_2.21 U3_2.22 U3_2.25 U3_2.26 U3_2.28 U3_2.29 U3_2.30 U3_3.4 U3_3.11 U3_3.21 U3_3.22 U3_3.25 U3_3.26 U3_3.28 U3_3.29 U3_3.30 U3_4.4 U3_4.11 U3_4.21 U3_4.22 U3_4.25 U3_4.26 U3_4.28 U3_4.29 U3_4.30

## Polygon pours and split planes (outlines as drawn)
GND on Top Layer "NONET_L01_P021" (solid, shelved, pour order 21): -14.6,11.6 -16.5,11.6 -16.5,15.6 -15.8,15.6 -14.6,14.4
5V on Top Layer "NONET_L01_P023" (solid, shelved, pour order 23): -11.6,14.6 -11.6,16.5 -15.6,16.5 -15.6,15.8 -14.4,14.6
GND on Top Layer "NONET_L01_P029" (solid, shelved, pour order 29): 14.6,11.6 16.5,11.6 16.5,15.6 15.8,15.6 14.6,14.4
5V on Top Layer "NONET_L01_P031" (solid, shelved, pour order 31): 11.6,14.6 11.6,16.5 15.6,16.5 15.6,15.8 14.4,14.6
OUT_W1 on Top Layer "PolygonDirect" (solid, shelved, pour order 32): -13.9,10.8 -13.9,8.9 -12.25,8.9 -12.25,10.8
OUT_V1 on Top Layer "PolygonDirect" (solid, shelved, pour order 40): -13.9,7.1 -13.9,5.2 -12.25,5.2 -12.25,7.1
OUT_U1 on Top Layer "PolygonDirect" (solid, shelved, pour order 46): -13.9,3.4 -13.9,1.5 -12.25,1.5 -12.25,3.4
OUT_U4 on Top Layer "PolygonDirect" (solid, shelved, pour order 47): -13.9,-1 -13.9,-2.9 -12.25,-2.9 -12.25,-1
OUT_V4 on Top Layer "PolygonDirect" (solid, shelved, pour order 48): -13.9,-4.7 -13.9,-6.6 -12.25,-6.6 -12.25,-4.7
OUT_W4 on Top Layer "PolygonDirect" (solid, shelved, pour order 49): -13.9,-8.4 -13.9,-10.3 -12.25,-10.3 -12.25,-8.4
OUT_W2 on Top Layer "PolygonDirect" (solid, shelved, pour order 51): 12.4,10.268 12.4,8.4 14.05,8.4 14.05,10.268
OUT_V2 on Top Layer "PolygonDirect" (solid, shelved, pour order 52): 12.4,6.568 12.4,4.7 14.05,4.7 14.05,6.568
OUT_U2 on Top Layer "PolygonDirect" (solid, shelved, pour order 53): 12.4,2.868 12.4,1 14.05,1 14.05,2.868
OUT_U3 on Top Layer "PolygonDirect" (solid, shelved, pour order 54): 12.4,-1.532 12.4,-3.4 14.05,-3.4 14.05,-1.532
OUT_V3 on Top Layer "PolygonDirect" (solid, shelved, pour order 55): 12.4,-5.232 12.4,-7.1 14.05,-7.1 14.05,-5.232
OUT_W3 on Top Layer "PolygonDirect" (solid, shelved, pour order 56): 12.4,-8.932 12.4,-10.8 14.05,-10.8 14.05,-8.932
VBAT on Top Layer "Top VBAT" (solid, shelved, pour order 57): -16.5,16.5 -16.5,-16.5 16.5,-16.5 16.5,16.5
no net on Top Solder "NONET_L01_P026" (solid, shelved): -11.5,14.5 -11.5,16.5 -15.6,16.5 -15.6,15.7 -14.4,14.5
no net on Top Solder "NONET_L01_P026" (solid, shelved): -14.5,11.5 -16.5,11.5 -16.5,15.6 -15.7,15.6 -14.5,14.4
no net on Top Solder "NONET_L01_P026" (solid, shelved): 14.5,11.5 16.5,11.5 16.5,15.6 15.7,15.6 14.5,14.4
no net on Top Solder "NONET_L01_P026" (solid, shelved, pour order 26): 11.5,14.5 11.5,16.5 15.6,16.5 15.6,15.7 14.4,14.5
GND on GND 2 "Layer 5 GND" (solid, shelved, pour order 25): -16.5,16.5 -16.5,-16.5 16.5,-16.5 16.5,16.5
GND on Bottom Layer "Bottom GND" (solid, shelved, pour order 64): -17.2,16.4 -17.2,-16.7 17.5,-16.7 17.5,16.4
VSS_R2 on Bottom Layer "PolygonDirect" (solid, shelved, pour order 61): 13.7,10.3 13.7,0.95 10.6,0.95 10.6,10.3
no net on Bottom Layer "PolygonDirect" (solid, shelved, pour order 35): -13.25,7.15 -10.8,7.15 -10.8,5.6 -11,5.4 -12.3,5.4 -12.4,5.3 -13.25,5.3
VSS_R3 on Bottom Layer "PolygonDirect" (solid, shelved, pour order 62): 13.7,-1.5 13.7,-10.85 10.6,-10.85 10.6,-1.5
VBAT on VBAT 1 "Layer 2 VBAT" (solid, shelved, pour order 30): -16.5,16.5 -16.5,-16.5 16.5,-16.5 16.5,16.5
VBAT on VBAT 2 "Layer 2 VBAT" (solid, shelved, pour order 33): -16.5,16.5 -16.5,-16.5 16.5,-16.5 16.5,16.5
GND on GND 1 "Layer 3 GND" (solid, shelved, pour order 5): -17.2,16.4 -17.2,-16.7 17.5,-16.7 17.5,16.4

## Silkscreen, mask and mechanical layers (free items; w line width, h text height)
Top Overlay:
  circle w0.44: c-13,-13 r1.31
  circle w0.44: c-13,13 r1.31
  circle w0.44: c13,13 r1.31
  circle w0.44: c13,-13 r1.31
  region: 0,-3.6 -1,-5.2 1,-5.2
  region: 1,-5.2 0,-6.8 2,-6.8
  region: -1,-5.2 -2,-6.8 0,-6.8
  lines w0.254: -16.4,-0.7 -13.3,-0.7 -13.3,-11.1 -16.3,-11.1 ; -16.4,0.7 -13.3,0.7 -13.3,11.1 -16.3,11.1 -16.4,11.1 ; -13,-1 -13,-0.6 ; -8.1,-16.5 -8.1,-13 -3.5,-13 -3.5,-16.5 ; 3.5,-16.5 3.5,-13 8.1,-13 8.1,-16.5 ; 16.3,-11.1 13.3,-11.1 13.3,-0.7 16.4,-0.7 ; 16.3,11.1 13.3,11.1 13.3,0.7 16.4,0.7
  text "5V" at -11.2,15 h1
  text "5V" at 9.5,15 h1
  text "GND" at -11.2,12.7 h1
  text "GND" at 8.6,12.7 h1
  text "1" at -8.05,3.15 h1.2
  text "2" at 7.75,3.15 h1.2
  text "4" at -8.15,-4.55 h1.2
  text "3" at 7.65,-4.55 h1.2
  text "_" at 8.8,-14.967 h2
  text "+" at -9.9,-16.133 h2
Bottom Overlay:
  circle w0.44: c13,-13 r1.31
  circle w0.44: c13,13 r1.31
  circle w0.44: c-13,-13 r1.31
  circle w0.44: c-13,13 r1.31
  text "ESC" at -0.15,23.5 h0.9
  text "v1.2" at -7.1,23.4 h0.7
  text "4 in 1" at 7.35,23.05 h0.9
  text "D" at 5.547,12.053 h0.7
  text "C" at 6.647,12.053 h0.7
  text "C" at -7.003,4.453 h0.7
  text "D" at -4.253,4.453 h0.7
  text "D" at 5.747,-4.247 h0.7
  text "C" at 6.847,-4.247 h0.7
  text "C" at -6.153,-12.547 h0.7
  text "D" at -5.053,-12.547 h0.7
Board:
  the board outline again, w0.127